# Altium PCB EE_3102.PcbDoc
Units mil, origin at the board's own origin, x right, y up, seen from the top; angles counter-clockwise.
Board outline 3000 x 2000 mil, 2 copper layers (Top Layer, Bottom Layer); 15 components, 13 nets, 68 pads, 0 vias.
Unrouted connection lines stored in the file: 2.
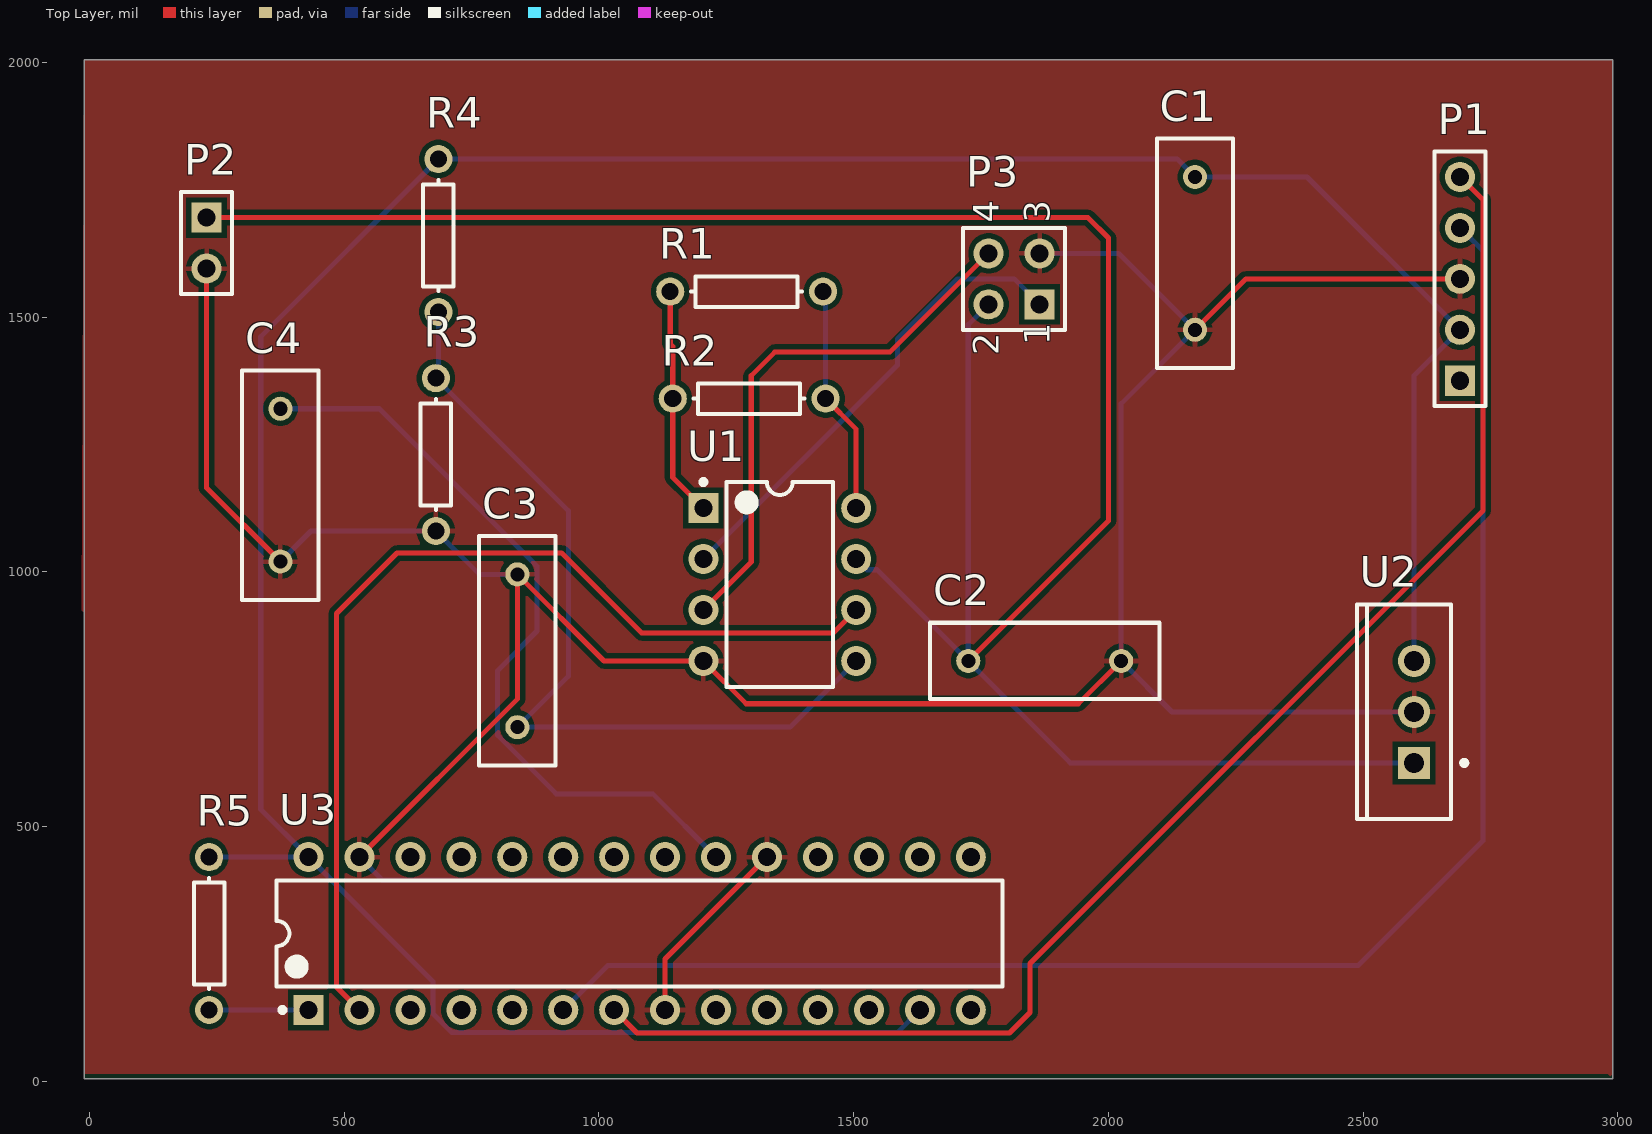
[diagram p0: Top Layer view]
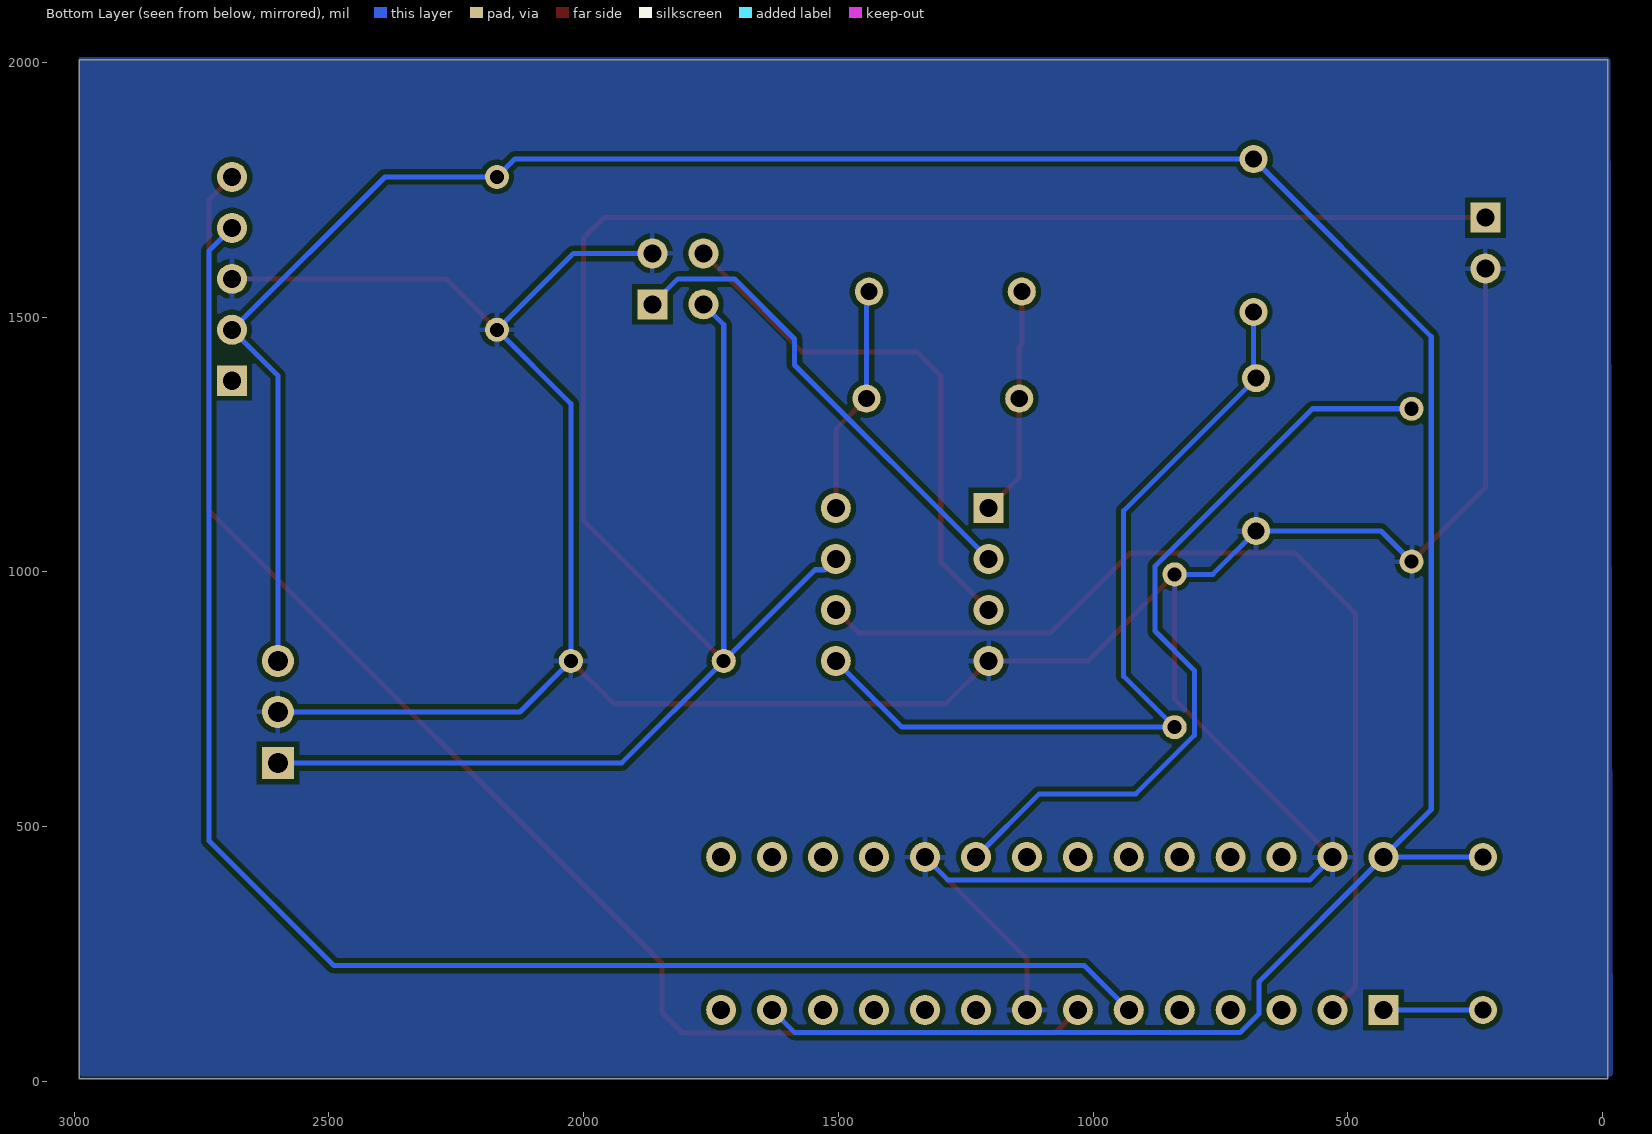
[diagram p1: Bottom Layer view, seen from below]

## Layer stack, top to bottom
Top Solder: solder mask 0.4, Solder Resist, Dk 3.5
Top Layer: signal copper 1.4
Dielectric 1: dielectric 12.6, FR-4, Dk 4.8
Bottom Layer: signal copper 1.4
Bottom Solder: solder mask 0.4, Solder Resist, Dk 3.5

## Board outline
-10,5 2990,5 2990,2005 -10,2005

## Design rules (kind name [scope] priority, off if disabled: settings)
Clearance [All] p1: gap=10 ignorepadtopadclearanceinfootprint=FALSE except(0: Arc-Hole Track-Hole SMDPad-Hole THPad-Hole Via-Hole Fill-Hole Poly-Hole Region-Hole Text-Hole)
PolygonConnect [All] p1: connectstyle=Relief reliefconductorwidth=10 reliefentries=4 polygonreliefangle="90 Angle" airgapwidth=10
RoutingVias [All] p1: holewidth=28 width=50 viastyle="Through Hole" minholewidth=28 minwidth=50 maxholewidth=28 maxwidth=50
SolderMaskExpansion [All] p1: expansion=4 istentingtop=FALSE
Width [All] p1: maxlimit=10 minlimit=10 preferedwidth=10
30 further rules are at their usual default settings.

## Components (designator, comment, footprint, x,y, rotation, side; value= is the part's Value field where it differs from the comment)
C1 "Cap" RAD-0.3 2170,1625 r90 top value=10uF
C2 "Cap" RAD-0.3 1875,825 r180 top value=0.1uF
C3 "Cap" RAD-0.3 840,845 r90 top value=10uF
C4 "Cap" RAD-0.3 375,1170 r90 top value=10uF
P1 "LCD" HDR1X5 2690,1375 r90 top
P2 "Inputs" HDR1X2 230,1695 r270 top
P3 "AAL002e" HDR2X2 1865,1525 r90 top
R1 "Res1" AXIAL-0.3 1290,1550 r180 top value=10K
R2 "Res1" AXIAL-0.3 1295,1340 r180 top value=10K
R3 "Res1" AXIAL-0.3 680,1230 r90 top value=100
R4 "Res1" AXIAL-0.3 685,1660 r90 top value=1K
R5 "Res1" AXIAL-0.3 235,290 r270 top value=10K
U1 "INA121P" P0008A 1355,975 r0 top
U2 "LM2937ET-3.3" NDE0003A 2600,725 r90 top
U3 "PIC24FJ64GA002-E/SP" SPDIP300-SP28 1080,290 r90 top

## Footprints (in the part's own frame and the unit in brackets; to place one, negate y for a bottom-side part, rotate by r counter-clockwise, add the part's x,y. Pads: shape width x height; smd on the part's side, far side on the other; paste and mask are expansions set on the pad)
AXIAL-0.3 [mm] "Axial Device, Thru-Hole; 2 Leads; 0.3 in Pin Spacing"
  round 1.4 hole 0.85: 1(-3.81,0) 2(3.81,0)
  silkscreen extent -2.77,-0.76 2.77,0.76
HDR1X2 [mm] "Connector; Header; 2 Position"
  rect 1.5x1.5 hole 0.9: 1(0,0)
  round 1.5 hole 0.9: 2(2.54,0)
  silkscreen extent -1.27,-1.27 3.81,1.27
HDR1X5 [mm] "Connector; Header; 5 Position"
  rect 1.5x1.5 hole 0.9: 1(0,0)
  round 1.5 hole 0.9: 2(2.54,0) 3(5.08,0) 4(7.62,0) 5(10.16,0)
  silkscreen extent -1.27,-1.27 11.43,1.27
HDR2X2 [mm] "Connector; Header; 2x2 Position"
  rect 1.5x1.5 hole 0.9: 1(0,0)
  round 1.5 hole 0.9: 2(0,2.54) 3(2.54,0) 4(2.54,2.54)
  silkscreen extent -1.27,-1.27 3.81,3.81
NDE0003A [mm] "FM, 3-Leads, Body 10.7x4.7mm, Pitch 2.54mm"
  rect 1.6x1.6 hole 1: 1(-2.54,0)
  round 1.6 hole 1: 2(0,0) 3(2.54,0)
  silkscreen extent -5.35,-2.63 5.35,2.85, body extent -5.4,-1.9 5.4,2.9, height 19.4
P0008A [mm] "DIP, 8-Leads, Body 10.15x6.6mm, Pitch 2.54mm"
  rect 1.5x1.5 hole 0.9: 1(-3.81,3.81)
  round 1.5 hole 0.9: 2(-3.81,1.27) 3(-3.81,-1.27) 4(-3.81,-3.81) 5(3.81,-3.81) 6(3.81,-1.27) 7(3.81,1.27) 8(3.81,3.81)
  silkscreen extent -3.93,-5.1 2.65,5.23, body extent -3.95,-5.07 3.95,5.07, height 5.08
RAD-0.3 [mm] "Radial Cap, Thru-Hole; 2 Leads; 0.3 in Pin Spacing"
  round 1.2 hole 0.7: 1(-3.81,0) 2(3.81,0)
  silkscreen extent -5.71,-1.91 5.71,1.91
SPDIP300-SP28 [mm] "DIP, 28-Pin, Row Spacing 7.62 mm, Pitch 2.54 mm"
  rect 1.5x1.5 hole 0.9: 1(-3.81,16.51)
  round 1.5 hole 0.9: 2(-3.81,13.97) 3(-3.81,11.43) 4(-3.81,8.89) 5(-3.81,6.35) 6(-3.81,3.81) 7(-3.81,1.27) 8(-3.81,-1.27) 9(-3.81,-3.81) 10(-3.81,-6.35) 11(-3.81,-8.89) 12(-3.81,-11.43) 13(-3.81,-13.97) 14(-3.81,-16.51) 15(3.81,-16.51) 16(3.81,-13.97) 17(3.81,-11.43) 18(3.81,-8.89) 19(3.81,-6.35) 20(3.81,-3.81) 21(3.81,-1.27) 22(3.81,1.27) 23(3.81,3.81) 24(3.81,6.35) 25(3.81,8.89) 26(3.81,11.43) 27(3.81,13.97) 28(3.81,16.51)
  silkscreen extent -3.93,-18.1 2.65,18.1, body extent -3.55,-18.1 3.55,18.1, height 5.33

## Part data
C1 C2 C3 C4: "Capacitor", LatestRevisionDate=17-Jul-2002, LatestRevisionNote="Re-released for DXP Platform.", PackageDescription="Radial Cap, Thru-Hole; 2 Leads; 0.3 in Pin Spacing", PackageReference=RAD-0.3, Published=8-Jun-2000, Publisher="Altium Limited"
P1: library part "Header 5", "Header, 5-Pin", LatestRevisionDate=17-Jul-2002, LatestRevisionNote="Re-released for DXP Platform.", Publisher="Altium Limited"
P2: library part "Header 2", "Header, 2-Pin", LatestRevisionDate=17-Jul-2002, LatestRevisionNote="Re-released for DXP Platform.", Publisher="Altium Limited"
P3: library part "Header 2X2", "Header, 2-Pin, Dual row", LatestRevisionDate=17-Jul-2002, LatestRevisionNote="Re-released for DXP Platform.", Publisher="Altium Limited"
R1 R2 R3 R4 R5: "Resistor", LatestRevisionDate=17-Jul-2002, LatestRevisionNote="Re-released for DXP Platform.", PackageDescription="Axial Device, Thru-Hole; 2 Leads; 0.3 in Pin Spacing", PackageReference=AXIAL-0.3, Published=8-Jun-2000, Publisher="Altium Limited"
U1: library part CMP-0992-00127-2, "FET-Input, Low Power Instrumentation Amplifier, -40 to 85 degC, 8-pin DIP (P8), Green (RoHS & no Sb/Br)", Input Bias Current (+/-)(Max)(nA)=0.05, Manufacturer="Texas Instruments", Quiescent Current (+/-)(Typ)(mA)=0.45, CMRR(Min)(dB)=96, Code_JEDEC=MS-001, ComponentLink1Description="Manufacturer URL", ComponentLink1URL=http://www.ti.com/, ComponentLink2Description=Datasheet, ComponentLink2URL=http://www.ti.com/general/docs/lit/getliterature.tsp?genericPartNumber=INA121&fileType=pdf, ComponentLink3Description="Package Specification", ComponentLink3URL=http://www.ti.com/litv/pdf/mpdi001b, DatasheetVersion=SBOS078, Eco-Plan="Green (RoHS & no Sb/Br)", Gain(V/V)="1 to 10000", Input Offset (+/-)(Max)(uV)=500, Input Offset Drift (+/-)(Max)(uV/Degrees Celsius)=5, Mounting Technology="Through Hole", Noise at 1kHz(Typ)(nV/rt(Hz))=20, Non-Linearity (+/-)(Max)(%)=0.005, Number of Channels=1, Output Offset (+/-)(Max)(uV)=500/G, Output Offset Drift (+/-)(Max)(uV/Degrees Celsius)=20/G, PackageDescription="8-Pin Plastic In-Line, Body 9.59 x 6.35 mm, Pitch 2.54 mm", PackageReference=P0008A, PackageVersion="4040082/E, 04/2010", PartNumber=INA121P, SubFamily="Dual Supply", Vs(Max)(V)=36, Vs(Min)(V)=4.5
U2: library part CMP-0062-02522-3, "500 mA Low Dropout Regulator, 3-pin TO-220", Manufacturer="Texas Instruments", PackageTopMarking=NSUZXYTTE#*LM2937ET*-3.3, PowerWise=N, ComponentLink1Description="Datasheet URL", ComponentLink1URL=http://www.ti.com/general/docs/lit/getliterature.tsp?genericPartNumber=LM2937-3.3&fileType=pdf, CompType="LDO IC", PackageDescription="TO-220, Molded, 3 Lead, Straight", PackageReference=NDE0003A, PinCount=3, RoHS=N
U3: library part CMP-0046-00005-2, "General Purpose 16-Bit Flash Microcontroller, 64KB Flash, 8KB SRAM, 28-Pin SPDIP, Extended Temperature", ComponentLink1Description=Datasheet, ComponentLink1URL=http://ww1.microchip.com/downloads/en/DeviceDoc/39881D.pdf, ComponentLink2Description="Packaging Specification", ComponentLink2URL=http://www.microchip.com/stellent/groups/techpub_sg/documents/packagingspec/en012702.pdf, ComponentLink3Description="Microchip.com Home", ComponentLink3URL=http://www.microchip.com/, DatasheetVersion="revD, Feb-2010", PackageDescription="28-Lead Skinny Plastic Dual In-Line (SP) - 300 mil Body [SPDIP]", PackageReference=SPDIP300-SP28, PackageVersion="revBB, Aug-2009", RevisionNote="Component URLs added."

## Nets (pads, with @x,y where several pads share a name; then routed paths per layer and width w, separated by ;. In a path a pad name is that pad's centre, name@x,y a point inside that pad or via, vN(x,y) a via of type N, cw(c..) or ccw(c..) an arc to the next point about the centre after c; other vN are vias at no path point)
+0.3: C3.1 R3.2 R4.1 U1.5 | length 1685
  Bottom Layer w10: R4.1 685,1385 R3.2 940,1120 940,795 C3.1 1375,695 U1.5
+3.3: C1.2 P1.2 R4.2 R5.1 U2.3 U3.13 U3.28 | length 5977.3
  Bottom Layer w10: R5.1 U3.28 ; U3.13 1585.47,95.47 711.56,95.47 674.53,132.5 674.53,195.47 U3.28 ; U2.3 2600,1385 P1.2 2390,1775 C1.2 2135,1810 R4.2 336.38,1461.38 336.38,533.62 U3.28
+6: C2.2 P2.1 P3.1 U1.7 U2.1 | length 4707.7
  Top Layer w10: P2.1 1960,1695 2000,1655 2000,1100 C2.2
  Bottom Layer w10: U1.7 1526,1004 1546,1004 C2.2 ; 1765,1525 1725,1485 C2.2 ; U2.1 1925,625 C2.2
GND: C1.1 C2.1 C3.2 C4.1 P1.3 P2.2 P3.3 R3.1 U1.4 U2.2 U3.8 U3.19 U3.27 | length 6643.3
  Top Layer w10: P2.2 230,1165 C4.1 ; U3.27 840,750 C3.2 1010,825 U1.4 1289,741 1941,741 C2.1 ; U3.8 1130,240 U3.19 ; C1.1 2270,1575 P1.3
  Bottom Layer w10: C4.1 435,1080 R3.1 765,995 C3.2 ; U3.27 574.53,395.47 1285.47,395.47 U3.19 ; P3.3 2020,1625 C1.1 2025,1330 C2.1 2125,725 U2.2
NetC4_2: C4.2 U3.20 | length 1523.2
  Bottom Layer w10: C4.2 569.62,1320 878.62,1011 878.62,883.62 801.38,806.38 801.38,679 916.19,564.19 1105.81,564.19 U3.20
NetP1_4: P1.4 U3.6 | length 3164.2
  Bottom Layer w10: U3.6 1017,227 2490,227 2735,472 2735,1630 P1.4
NetP1_5: P1.5 U3.7 | length 2878.1
  Top Layer w10: U3.7 1075,95 1806,95 1846,135 1846,231 2735,1120 2735,1730 P1.5
NetP3_1: P3.2 U1.2 | length 938.4
  Bottom Layer w10: U1.2 1586,1406 1586,1457 1704,1575 1815,1575 1865,1525
NetP3_4: P3.4 U1.3 | length 1064.3
  Top Layer w10: U1.3 1299,1019 1299,1385 1345,1431 1571,1431 P3.4
NetR1_1: R1.1 R2.1 U1.8 | length 451.9
  Top Layer w10: R2.1 1505,1280 U1.8
  Bottom Layer w10: R1.1 1445,1545 R2.1
NetR1_2: R1.2 R2.2 U1.1 | length 451.9
  Top Layer w10: R1.2 1140,1447 1145,1442 R2.2 1145,1185 U1.1
NetR5_2: R5.2 U3.1 | length 195
  Bottom Layer w10: R5.2 U3.1
NetU1_6: U1.6 U3.2 | length 1949.6
  Top Layer w10: U3.2 485,185 485,918 604,1037 927,1037 1084,880 1460,880 U1.6
pads on no net: P1.1 U3.3 U3.4 U3.5 U3.9 U3.10 U3.11 U3.12 U3.14 U3.15 U3.16 U3.17 U3.18 U3.21 U3.22 U3.23 U3.24 U3.25 U3.26

## Polygon pours and split planes (outlines as drawn)
GND on Top Layer "GND_L01_P000" (solid, pour order 0): -10,2005 2990,2005 2990,15 2985,10 2980,15 -10,15 -10,920 -15,925
GND on Bottom Layer "GND_L02_P002" (solid, pour order 2): -15,2005 -10,2010 2990,2010 2990,15 2985,10 -20,10

## Silkscreen, mask and mechanical layers (free items; w line width, h text height)
Mechanical 1:
  the board outline again, w10

## Text inside footprints (layer, text, board x,y; h text height)
P3: Top Overlay "1" at 1885,1445 h50 r90; Top Overlay "2" at 1785,1425 h50 r90; Top Overlay "4" at 1785,1685 h50 r90; Top Overlay "3" at 1885,1685 h50 r90